# Altium PCB auto-pet-feeder.PcbDoc
Units mil, origin at the board's own origin, x right, y up, seen from the top; angles counter-clockwise.
Board outline 1940 x 2210 mil, 2 copper layers (L1, L2), stack 62.8 mil thick; 8 components, 6 nets, 51 pads, 0 vias.
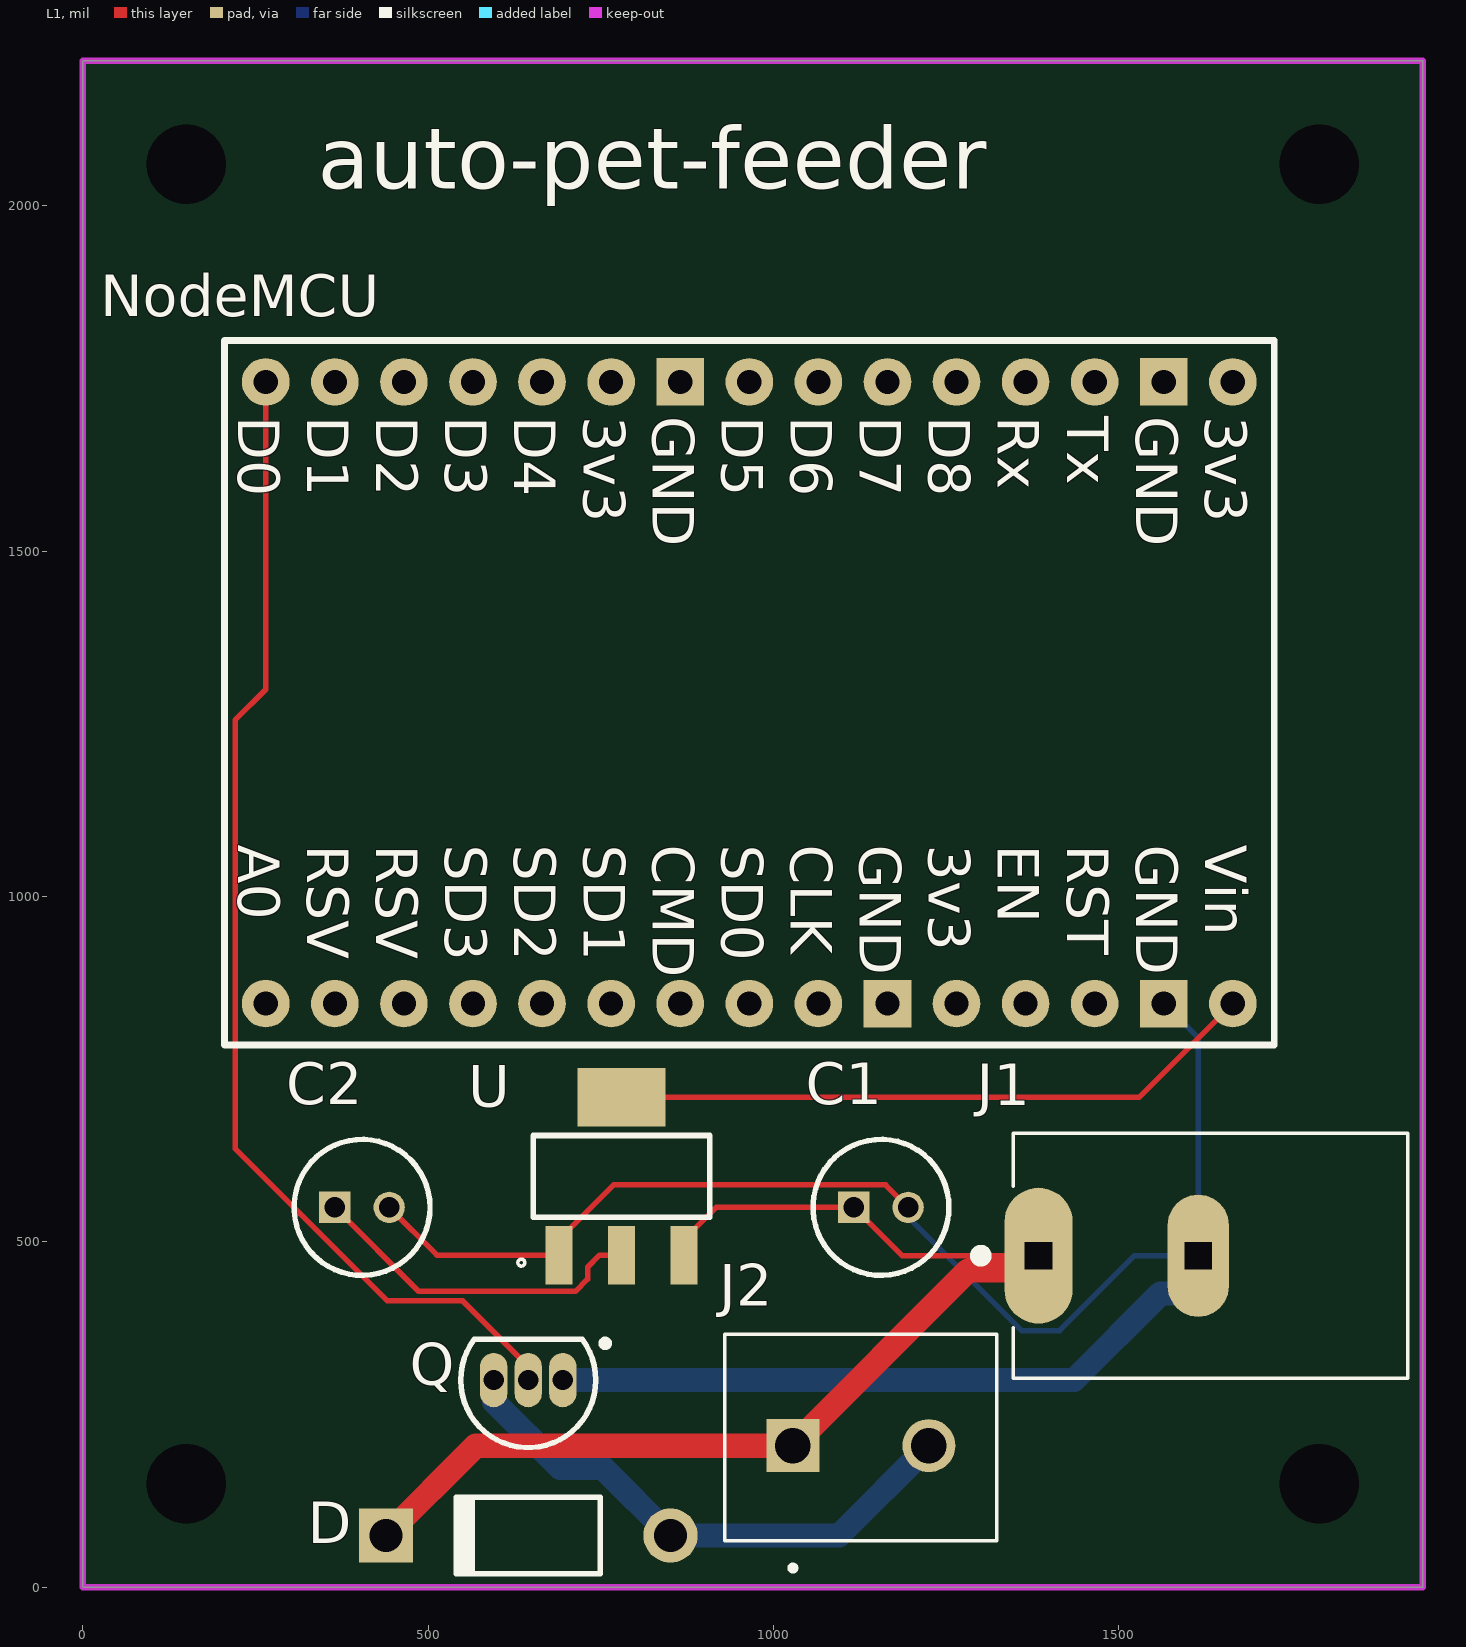
[diagram p0: L1 view]
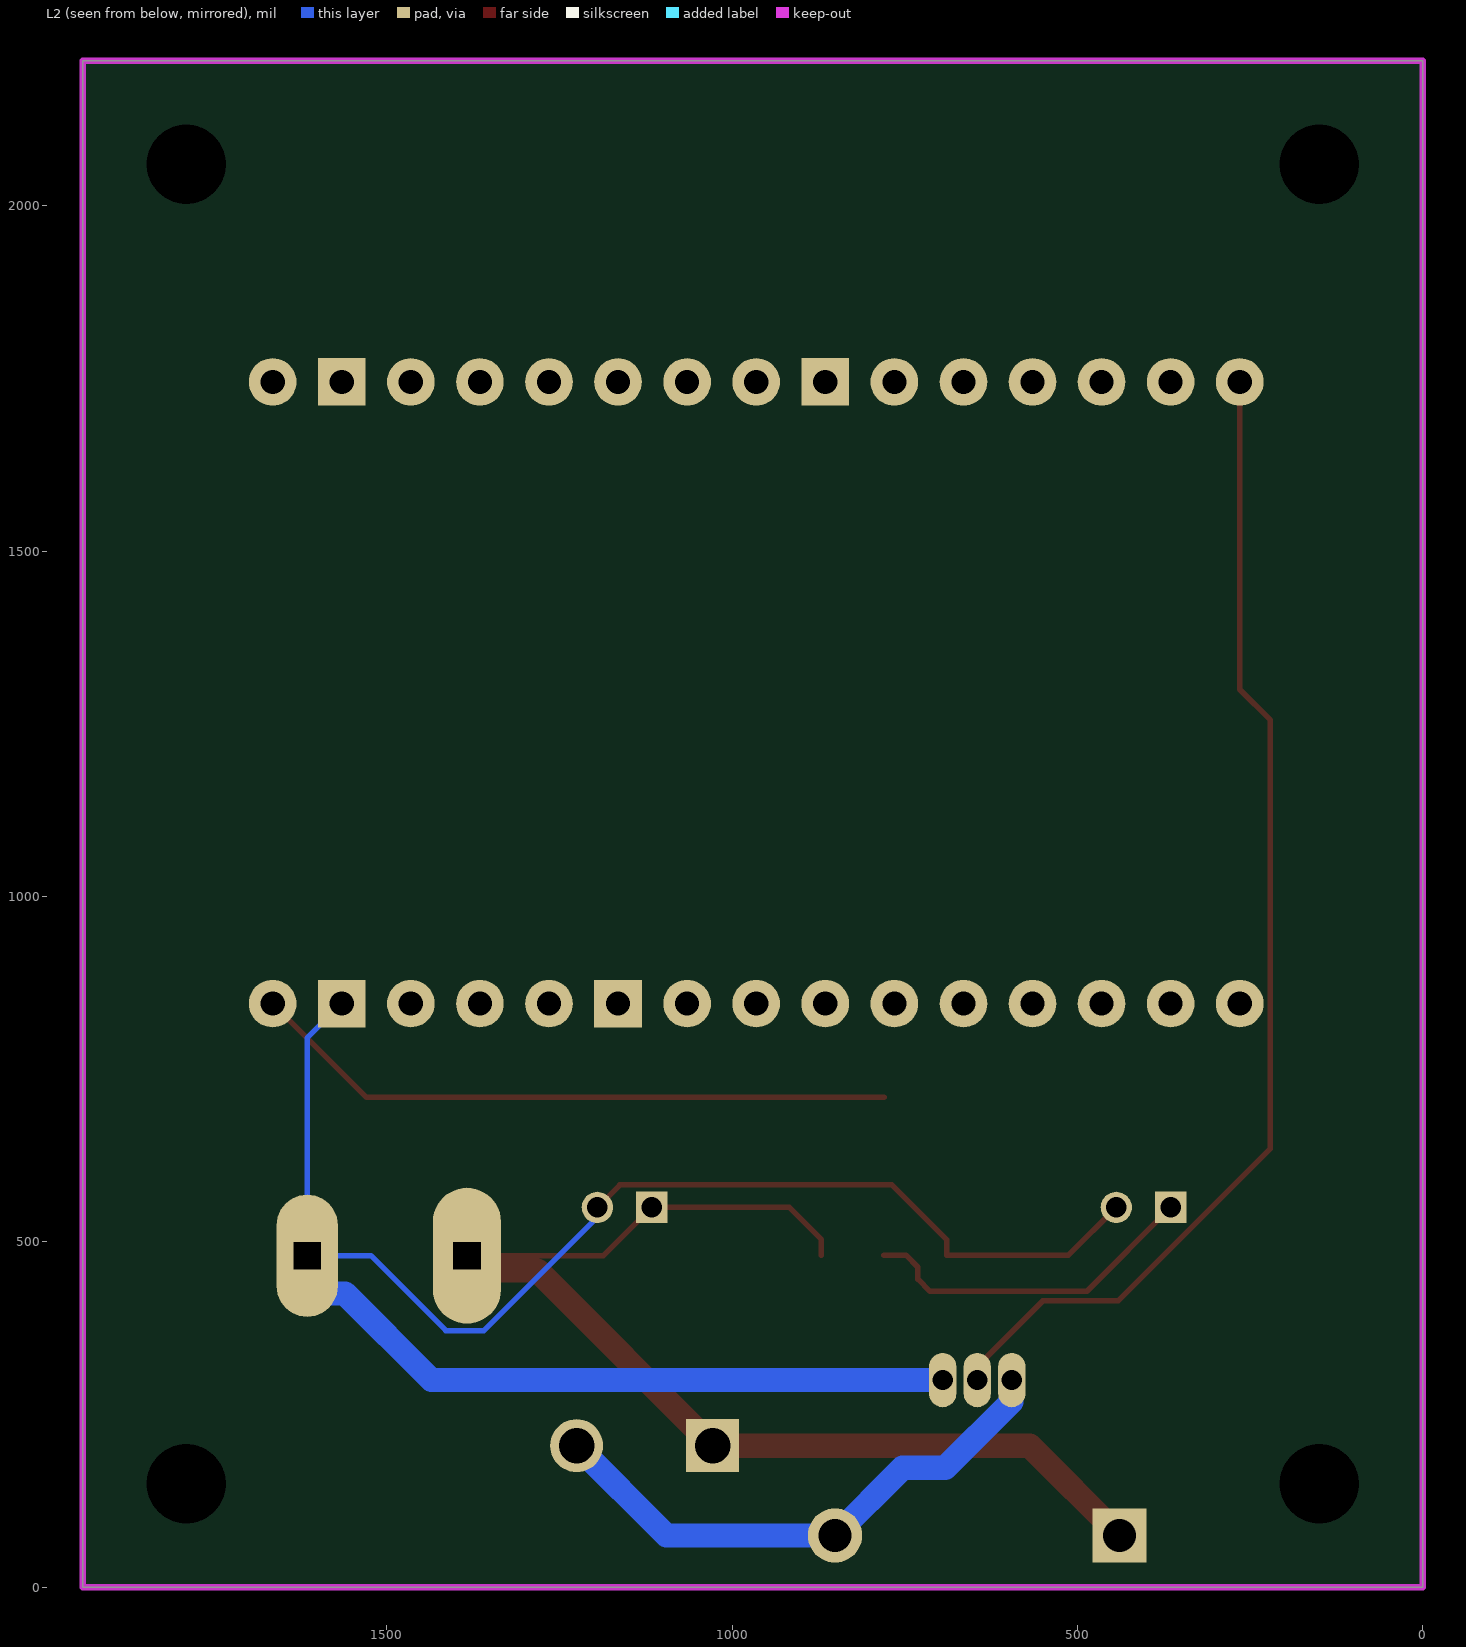
[diagram p1: L2 view, seen from below]
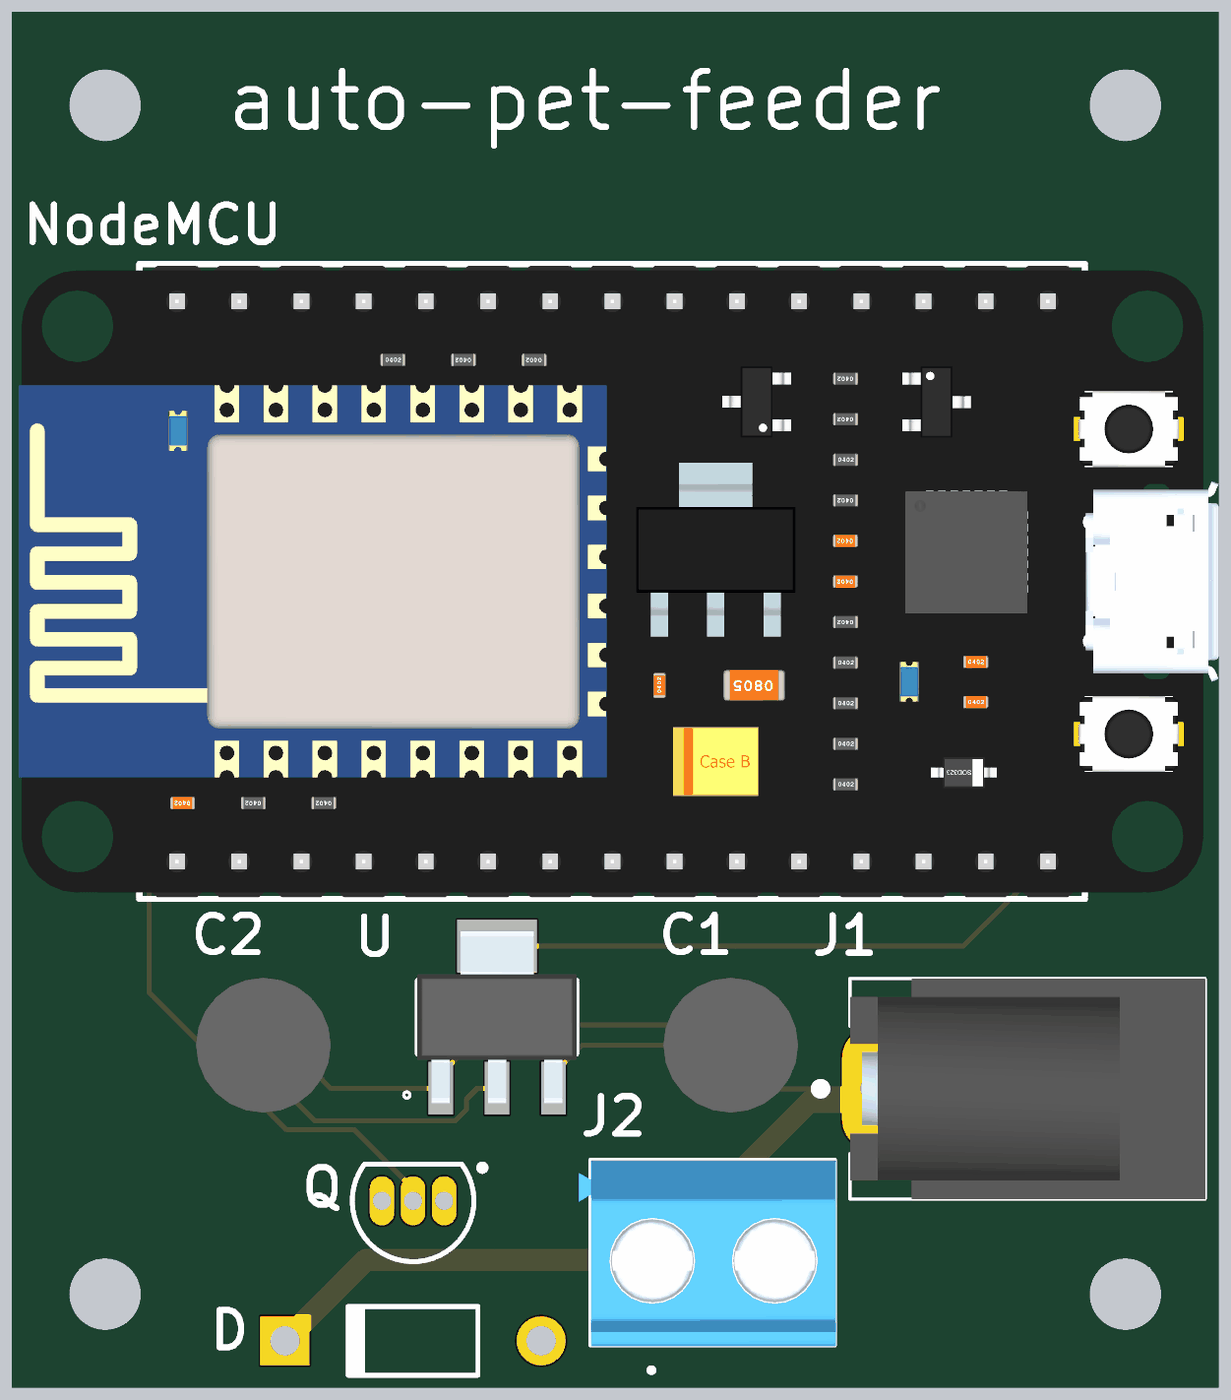
[diagram p2: 3D render of the assembled board from above, using the file's embedded part models]

## Layer stack, top to bottom
Top Solder: solder mask 0.1, Solder Resist, Dk 1
L1: signal copper 1.4
Core: dielectric 60, FR-4, Dk 4.6
L2: signal copper 1.4
Bottom Solder: solder mask 0.1, Solder Resist, Dk 1

## Board outline
0,0 1940,0 1940,2210 0,2210

## Design rules (kind name [scope] priority, off if disabled: settings)
BoardOutlineClearance [All] p1: gap=15 ignorepadtopadclearanceinfootprint=FALSE
Clearance [All] p1: gap=6 ignorepadtopadclearanceinfootprint=FALSE except(0: Arc-Hole Track-Hole SMDPad-Hole THPad-Hole Via-Hole Fill-Hole Poly-Hole Region-Hole Text-Hole)
ComponentClearance [All] p1: gap=1 collisioncheckmode=3 verticalgap=1 showdistances=FALSE
DiffPairsRouting [All] p1: maxlimit=393.7 minlimit=6 mostfreqgap=8 toplayer_minwidth=6 toplayer_maxwidth=15 toplayer_prefwidth=8 bottomlayer_minwidth=6 bottomlayer_maxwidth=15 bottomlayer_prefwidth=8 maxuncoupledlength=500
HoleSize [All] p1: absolutevalues=TRUE maxlimit=265 minlimit=10 maxpercent=80.000 minpercent=20.000
HoleToHoleClearance [All] p1: gap=10 allowstackedmicrovias=FALSE
MinimumAnnularRing [All] p1: minimumring=5
MinimumSolderMaskSliver [All] p1: minsoldermaskwidth=0
PlaneClearance [All] p1: clearance=10
PlaneConnect [All] p1: planeconnectstyle=Direct reliefexpansion=16 reliefentries=4 reliefconductorwidth=6 reliefairgap=6
PolygonConnect [All] p1: connectstyle=Relief reliefconductorwidth=8 reliefentries=4 polygonreliefangle="90 Angle" airgapwidth=6
RoutingCorners [All] p1: cornerstyle=45-Degree minsetback=49.21 maxsetback=49.21
RoutingVias [All] p1: holewidth=15 width=30 viastyle="Through Hole" minholewidth=13 minwidth=27 maxholewidth=100 maxwidth=114
SilkToSilkClearance [All] p1: silktosilkclearance=0
SilkToSolderMaskClearance [IsPad] p1: minsilkscreentomaskgap=6 clearancetoexposedcopper=TRUE
SolderMaskExpansion [All] p1: expansion=2.95 istentingtop=FALSE
Width [All] p1: maxlimit=400 minlimit=6 preferedwidth=8
20 further rules are at their usual default settings.

## Components (designator, comment, footprint, x,y, rotation, side; value= is the part's Value field where it differs from the comment)
C1 "EEU-FR1H100" CAPPRD200W55D500H1250 1116.26,550 r0 top
C2 "EEU-FR1H100" CAPPRD200W55D500H1250 365,550 r0 top
D "Diode 1N4004" DO-41 645,75 r180 top
J1 "PJ-037A" CUI_PJ-037A 1378.78,480 r0 top
J2 "TB002-500-02BE" CUI_TB002-500-02BE 1028.15,205 r0 top
NodeMCU "NodeMCU DevKit v1.0" "NodeMCU DevKit v1.0 - Inside Labels" 1665,1745 r270 top
Q "2N3904" TO-92A 645,300 r90 top
U "NCP1117ST50T3G" SOT230P700X180-4N 780,595 r90 top

## Footprints (in the part's own frame and the unit in brackets; to place one, negate y for a bottom-side part, rotate by r counter-clockwise, add the part's x,y. Pads: shape width x height; smd on the part's side, far side on the other; paste and mask are expansions set on the pad)
CAPPRD200W55D500H1250 [mm]
  rect 1.15x1.15 hole 0.75: 1(0,0)
  round 1.15 hole 0.75: 2(2,0)
  silkscreen extent -1.5,-2.5 3.5,2.5, body extent -1.75,-2.75 3.75,2.75, height 12.5
CUI_PJ-037A [mm]
  oval 2.5x5 hole 1 square: 1(0.127,0)
  oval 2.25x4.5 hole 1 square: 2(6,0)
  silkscreen extent -2.2,-4.5 13.7,4.5, body extent -0.78,-4.5 13.72,4.5, height 11.05
CUI_TB002-500-02BE [mm]
  rect 1.95x1.95 hole 1.3: 1(0,0)
  round 1.95 hole 1.3: 2(5,0)
  silkscreen extent -2.5,-4.6 7.5,4.1, body extent -2.96,-3.54 7.54,4.06, height 10.03
DO-41 [mm] "Diode, Axial; Body 5.2 x 2.7 mm (LxDia. max), Lead Dia. 0.86 mm (max)"
  round 2 hole 1.2: 1(-5.23,0)
  rect 2x2 hole 1.2: 2(5.23,0)
  silkscreen extent -2.65,-1.4 2.75,1.4
"NodeMCU DevKit v1.0 - Inside Labels" [mil]
  round 69 hole 35: 1(0,0) 3(0,-200) 4(0,-300) 5(0,-400) 6(0,-500) 7(0,-600) 8(0,-700) 10(0,-900) 11(0,-1000) 12(0,-1100) 13(0,-1200) 14(0,-1300) 15(0,-1400) 16(900,-1400) 17(900,-1300) 18(900,-1200) 19(900,-1100) 20(900,-1000) 21(900,-900) 22(900,-800) 23(900,-700) 24(900,-600) 26(900,-400) 27(900,-300) 28(900,-200) 30(900,0)
  rect 69x69 hole 35: 2(0,-100) 9(0,-800) 25(900,-500) 29(900,-100)
  silkscreen extent -60,-1460 960,60, body extent -57,-1654 957,275, height 247
SOT230P700X180-4N [mm]
  rect 2.15x1 smd: 1(-2.9,2.3) 2(-2.9,0) 3(-2.9,-2.3)
  rect 2.15x3.25 smd: 4(2.9,0)
  silkscreen extent -3.3,-3.25 1.5,3.81, body extent -3.5,-3.25 3.5,3.25, height 1.8
TO-92A [mm] "TO, Flat Index; 3 In-Line, Axial Leads; Body Dia. 4.5mm; Leads 0.51 x 0.48 mm (max)"
  oval 2x1 hole 0.746: 1(0,-1.27) 2(0,0) 3(0,1.27)
  silkscreen extent -2.48,-2.96 1.5,2.48, body extent -2.48,-2.5 1.5,2.5, height 6.86

## Part data
C1 C2: "Capacitor Polarised", Manufacturer_Name=Panasonic, Mouser Part Number=667-EEU-FR1H100, Arrow Part Number=EEU-FR1H100, Datasheet Link=https://mouser.componentsearchengine.com/Datasheets/1/EEU-FR1H100.pdf, Height=12.5mm, Manufacturer_Part_Number=EEU-FR1H100, Mouser Price/Stock=https://www.mouser.co.uk/ProductDetail/Panasonic/EEU-FR1H100?qs=tfZGHB2PWd1NAbdNSgjToQ%3D%3D
D: "1 Amp General Purpose Rectifier", Code_JEDEC=DO-204-AL, ComponentLink1Description="Manufacturer Link", ComponentLink1URL=http://www.fairchildsemi.com/, ComponentLink2Description=Datasheet, ComponentLink2URL=http://www.fairchildsemi.com/ds/1N%2F1N4001.pdf, DatasheetVersion=1998, LatestRevisionDate=17-Jul-2002, LatestRevisionNote="Re-released for DXP Platform.", PackageDescription="Diode, Axial; Body 5.2 x 2.7 mm (LxDia. max), Lead Dia. 0.86 mm (max)", PackageReference=DO-41, PackageVersion=Aug-1999, Published=8-Jun-2000, Publisher="Altium Limited"
J1: "2.0 x 6.5 mm, 2.5 A, Horizontal, Through Hole, Dc Power Jack Connector", Package=None, Availability=Unavailable, CUI_purchase_URL=https://www.cuidevices.com/product/interconnect/connectors/dc-power-connectors/jacks/pj-037a?utm_source=snapeda.com&utm_medium=referral&utm_campaign=snapedaBOM, MF="CUI Devices", MP=PJ-037A, Price=None, SnapEDA_Link=https://www.snapeda.com/parts/PJ-037A/CUI%20Devices/view-part/493699/?ref=snap
J2: "2~24 Poles, Screw Type, Horizontal, 5.0 Pitch, 22~12 _AWG_, Terminal Block Connector", Package=None, Availability=Unavailable, CUI_purchase_URL=https://www.cuidevices.com/product/interconnect/connectors/terminal-blocks/tb002-500-series?utm_source=snapeda.com&utm_medium=referral&utm_campaign=snapedaBOM, MF="CUI Devices", MP=TB002-500-02BE, Price=None, SnapEDA_Link=https://www.snapeda.com/parts/TB002-500-02BE/CUI%20Devices/view-part/3590407/?ref=snap
Q: "NPN General Purpose Amplifier", ComponentLink1Description="Manufacturer Link", ComponentLink1URL=http://www.fairchildsemi.com/, ComponentLink2Description=Datasheet, ComponentLink2URL=http://www.fairchildsemi.com/ds/2N%2F2N3904.pdf, DatasheetVersion=1997, LatestRevisionDate=15-Jan-2003, LatestRevisionNote="PCB Footprint 'BCY-W3/D4.7' replaced", PackageDescription="TO, Flat Index; 3 In-Line, Axial Leads; Body Dia. 4.5mm; Leads 0.51 x 0.48 mm (max)", PackageReference=TO-92A, PackageVersion=Sep-1998, Published=8-Jun-2000, Publisher="Altium Limited"
U: "Linear Voltage Regulator IC Positive Fixed 1 Output 1A SOT-223", Package="TO-261-4 ON Semiconductor", Availability=Unavailable, MF="ON Semiconductor", MP=NCP1117ST50T3G, Price=None, SnapEDA_Link=https://www.snapeda.com/parts/NCP1117ST50T3G/ON%20Semiconductor/view-part/104400/?ref=snap

## Free pads (board coordinates)
  round 0 hole 115 unplated: 12(150,150) 12(150,2060) 12(1790,150) 12(1790,2060)

## Nets (pads, with @x,y where several pads share a name; then routed paths per layer and width w, separated by ;. In a path a pad name is that pad's centre, name@x,y a point inside that pad or via, vN(x,y) a via of type N, cw(c..) or ccw(c..) an arc to the next point about the centre after c; other vN are vias at no path point)
NetC1_1: C1.1 D.2 J1.1 J2.1 U.3 | length 1696.6
  L1 w8: U.3 870.55,503.46 917.09,550 C1.1 1186.26,480 J1.1
  L1 w35.1: D.2 569.09,205 J2.1 1281.92,458.77 1362.55,458.77 J1.1
NetC1_2: C1.2 C2.2 J1.2 NodeMCU.29 Q.1 U.1 | length 2793.7
  L1 w8: C2.2 512.91,480.83 U.1 689.45,503.46 768.62,582.64 1162.36,582.64 C1.2
  L2 w8: C1.2 1202.13,542.87 1202.13,528.7 1359.25,371.57 1414.3,371.57 1522.73,480 J1.2 1615,795 NodeMCU.29
  L2 w35.1: Q.1 1435,300 1560.48,425.48 1590.29,425.48 1615,450.18 J1.2
NetC2_1: C2.1 U.2 | length 497.1
  L1 w8: C2.1 486.5,428.5 713.28,428.5 730.8,446.02 730.8,463.31 748.31,480.83 U.2
NetD_1: D.1 J2.2 Q.3 | length 795.1
  L2 w35.1: Q.3 595.82,299.18 595.82,268.35 691.29,172.88 753.03,172.88 D.1 1095,75 J2.2
NetNodeMCU_15: NodeMCU.15 Q.2 | length 1703.2
  L1 w8: NodeMCU.15 265,1299.78 220.5,1255.28 220.5,635.08 441.08,414.5 550.18,414.5 645,319.68 Q.2
NetNodeMCU_30: NodeMCU.30 U.4 | length 941.3
  L1 w8: U.4 1529.17,709.17 NodeMCU.30
pads on no net: NodeMCU.1 NodeMCU.2 NodeMCU.3 NodeMCU.4 NodeMCU.5 NodeMCU.6 NodeMCU.7 NodeMCU.8 NodeMCU.9 NodeMCU.10 NodeMCU.11 NodeMCU.12 NodeMCU.13 NodeMCU.14 NodeMCU.16 NodeMCU.17 NodeMCU.18 NodeMCU.19 NodeMCU.20 NodeMCU.21 NodeMCU.22 NodeMCU.23 NodeMCU.24 NodeMCU.25 NodeMCU.26 NodeMCU.27 NodeMCU.28

## Keep-outs
Keep-Out Layer:
  the board outline again, w10

## Silkscreen, mask and mechanical layers (free items; w line width, h text height)
Top Overlay:
  text "auto-pet-feeder" at 340,2024.99 h90

## Text inside footprints (layer, text, board x,y; h text height)
NodeMCU: Top Overlay "SD0" at 925.01,1075 h60 r270; Top Overlay "SD3" at 525.01,1075 h60 r270; Top Overlay "D3" at 525.01,1695 h60 r270; Top Overlay "D2" at 425.01,1695 h60 r270; Top Overlay "SD2" at 625.01,1075 h60 r270; Top Overlay "CLK" at 1025.01,1075 h60 r270; Top Overlay "3v3" at 1625.01,1695 h60 r270; Top Overlay "D8" at 1225.01,1695 h60 r270; Top Overlay "RSV" at 425.01,1075 h60 r270; Top Overlay "GND" at 1125.01,1075 h60 r270; Top Overlay "Rx" at 1325.01,1695 h60 r270; Top Overlay "EN" at 1325.01,1075 h60 r270; Top Overlay "3v3" at 1225.01,1075 h60 r270; Top Overlay "D5" at 925.01,1695 h60 r270; Top Overlay "CMD" at 825.01,1075 h60 r270; Top Overlay "D7" at 1125.01,1695 h60 r270; Top Overlay "SD1" at 725.01,1075 h60 r270; Top Overlay "3v3" at 725.01,1695 h60 r270; Top Overlay "RSV" at 325.01,1075 h60 r270; Top Overlay "GND" at 825.01,1695 h60 r270; Top Overlay "Tx" at 1425.01,1695 h60 r270; Top Overlay "Vin" at 1625.01,1075 h60 r270; Top Overlay "RST" at 1425.01,1075 h60 r270; Top Overlay "GND" at 1525.01,1695 h60 r270; Top Overlay "GND" at 1525.01,1075 h60 r270; Top Overlay "D6" at 1025.01,1695 h60 r270; Top Overlay "D1" at 325.01,1695 h60 r270; Top Overlay "D0" at 225.01,1695 h60 r270; Top Overlay "D4" at 625.01,1695 h60 r270; Top Overlay "A0" at 225.01,1075 h60 r270